# EAGLE board multi_paste (EAGLE 6.6.0)
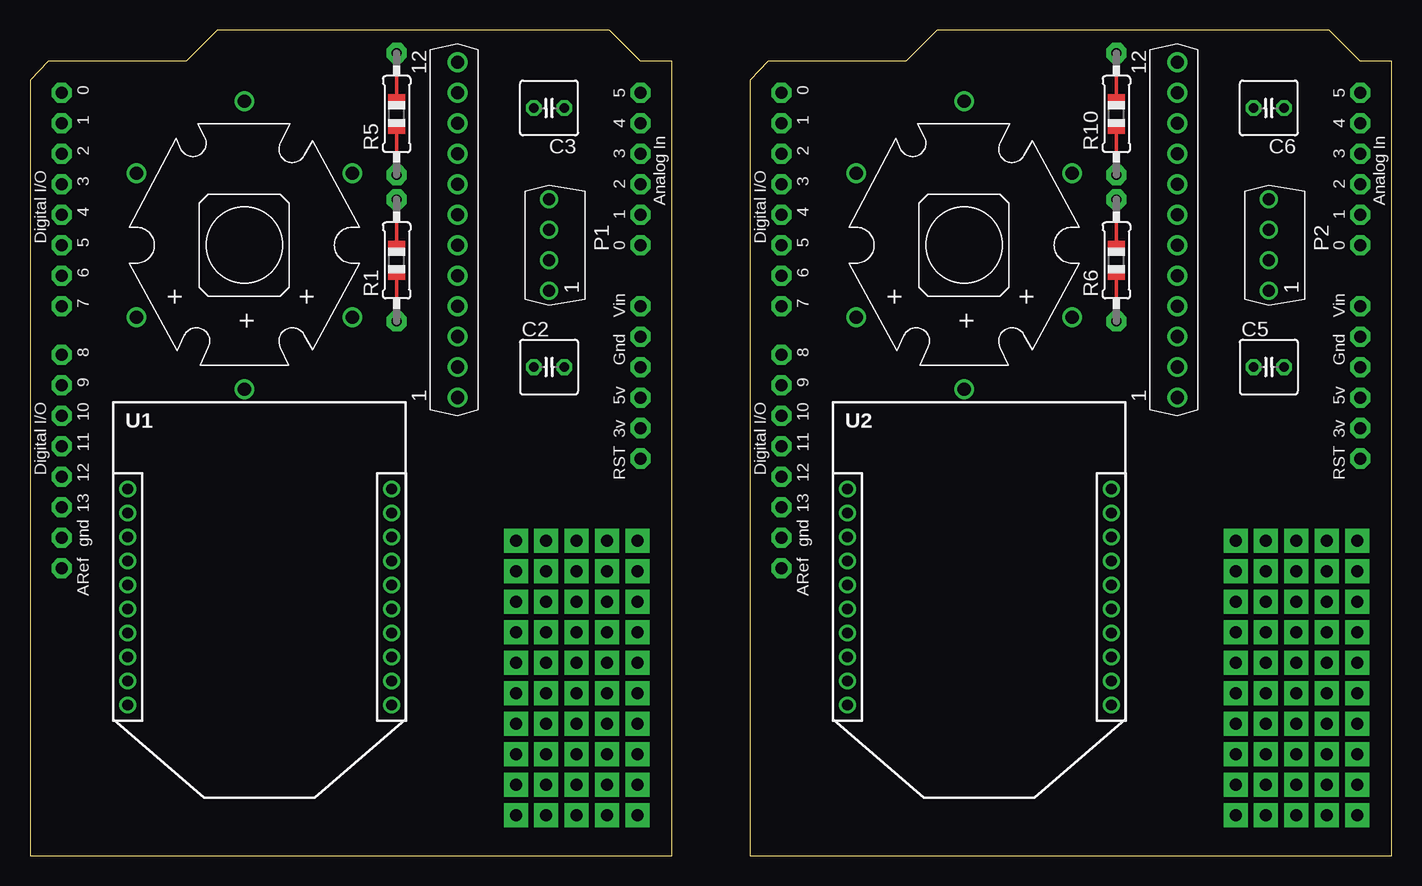
[diagram p0: board, top side]
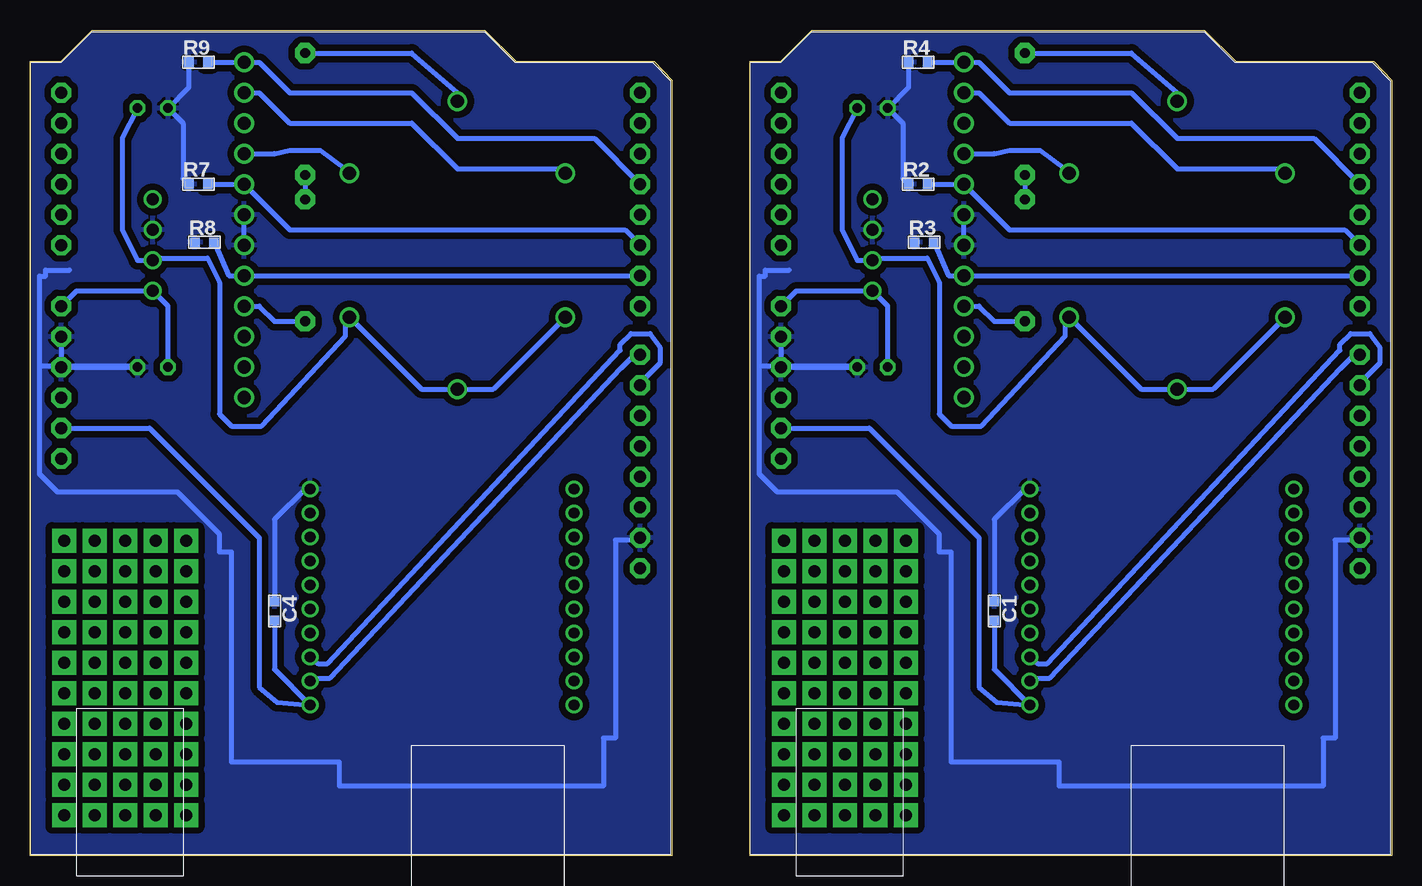
[diagram p1: board, bottom side, seen from below]

Size 113.5 x 68.8 mm. Coordinates in mm from the lower left corner, seen from the top.
Outline: 53.5,0 53.5,66.2 50.9,66.2 48.3,68.8 15.6,68.8 13,66.2 1.5,66.2 0,64.6 0,0 53.5,0
Outline: 113.5,0 113.5,66.2 110.9,66.2 108.3,68.8 75.6,68.8 73,66.2 61.5,66.2 60,64.6 60,0 113.5,0
Copper layers (1*16): Top 0.035mm / dielectric 1.5mm / Bottom 0.035mm
Design rules "default *": minimum track width 10mil, minimum drill 24mil, track to track 8mil, track to pad 8mil, pad to pad 8mil, via to via 8mil, smd to smd 8mil, copper to edge 0mil, drill to drill 8mil, minimum pad ring 10mil, minimum via ring 8mil, stop-mask expansion 4mil, vias tented up to drill 0mil, thermal gap 10mil

## Footprints (pad centres in the part's own frame; a part is rotated, then mirrored left to right if it is on the bottom)
1608(1.6*0.8MM) = smd 0.8 x 0.8: P$1 0.8,0; P$2 -0.8,0
C025-050X050 = drill 0.813 octagon: 1 -1.27,0; 2 1.27,0
OSTCXBC1C1S_WITH_HEATSINK = drill 1.1: B+ -6,9; B- 6,9; G+ -6,-9; G- 6,-9; R+ -12,0; R- 12,0
PQ3RD23 = drill 1: 1 -3.81,0; 2 -1.27,0; 3 1.27,0; 4 3.81,0
MP4401 = drill 1.1: 1 -13.97,0; 2 -11.43,0; 3 -8.89,0; 4 -6.35,0; 5 -3.81,0; 6 -1.27,0; 7 1.27,0; 8 3.81,0; 9 6.35,0; 10 8.89,0; 11 11.43,0; 12 13.97,0
0805-THM = drill 0.813 pad 1.676 octagon: 1 -5.08,0; 2 5.08,0
1608(1.6*0.8MM)' = smd 0.8 x 0.8: P$3 -0.8,0; P$4 0.8,0
XBEE_ON_XPPN101BFCN-RC = drill 0.9: 1 -11,18; 2 -11,16; 3 -11,14; 4 -11,12; 5 -11,10; 6 -11,8; 7 -11,6; 8 -11,4; 9 -11,2; 10 -11,0; 11 11,0; 12 11,2; 13 11,4; 14 11,6; 15 11,8; 16 11,10; 17 11,12; 18 11,14; 19 11,16; 20 11,18
ARDUINO-NOHOLE = drill 1 pad 1.676 octagon: 3V 35.56,2.54; 5V 38.1,2.54; A0 50.8,2.54; A1 53.34,2.54; A2 55.88,2.54; A3 58.42,2.54; A4 60.96,2.54; A5 63.5,2.54; AREF 23.876,50.8; D0 63.5,50.8; D1 60.96,50.8; D2 58.42,50.8; D3 55.88,50.8; D4 53.34,50.8; D5 50.8,50.8; D6 48.26,50.8; D7 45.72,50.8; D8 41.656,50.8; D9 39.116,50.8; D10 36.576,50.8; D11 34.036,50.8; D12 31.496,50.8; D13 28.956,50.8; GND 26.416,50.8; GND1 43.18,2.54; GND2 40.64,2.54; RESET 33.02,2.54; VIN 45.72,2.54

## Placement (x,y rotation side)
C1  [1608(1.6*0.8MM)]  33.11,20.39 270 bottom
C2  50u  [C025-050X050]  43.27,40.71 0 top
C3  50u  [C025-050X050]  43.27,62.3 180 top
C4  [1608(1.6*0.8MM)]  93.11,20.39 270 bottom
C5  50u  [C025-050X050]  103.27,40.71 0 top
C6  50u  [C025-050X050]  103.27,62.3 180 top
LED1  OSTCXBC1C1S  [OSTCXBC1C1S_WITH_HEATSINK]  17.87,50.87 90 top
LED2  OSTCXBC1C1S  [OSTCXBC1C1S_WITH_HEATSINK]  77.87,50.87 90 top
P1  PQ3RD23  [PQ3RD23]  43.27,50.87 90 top
P2  PQ3RD23  [PQ3RD23]  103.27,50.87 90 top
Q1  MP4401  [MP4401]  35.65,52.14 90 top
Q2  MP4401  [MP4401]  95.65,52.14 90 top
R1  1  [0805-THM]  30.57,49.6 90 top
R2  10k  [1608(1.6*0.8MM)']  39.46,55.95 0 bottom
R3  10k  [1608(1.6*0.8MM)']  38.96,51.1 0 bottom
R4  10k  [1608(1.6*0.8MM)']  39.46,66.11 0 bottom
R5  1  [0805-THM]  30.57,61.8 90 top
R6  1  [0805-THM]  90.57,49.6 90 top
R7  10k  [1608(1.6*0.8MM)']  99.46,55.95 0 bottom
R8  10k  [1608(1.6*0.8MM)']  98.96,51.1 0 bottom
R9  10k  [1608(1.6*0.8MM)']  99.46,66.11 0 bottom
R10  1  [0805-THM]  90.57,61.8 90 top
U1  XBEE_PROXPPN101BFCN  [XBEE_ON_XPPN101BFCN-RC]  19.14,30.55 180 top
U2  XBEE_PROXPPN101BFCN  [XBEE_ON_XPPN101BFCN-RC]  79.14,30.55 180 top
U$1  ARDUINO-NOHOLE  [ARDUINO-NOHOLE]  53.43,0.07 90 top
U$2  ARDUINO-NOHOLE  [ARDUINO-NOHOLE]  113.43,0.07 90 top

## Library data of the parts
C1 C4 = Capasitor
C2 C3 C5 C6 = rcl
LED1 LED2 = LED
P1 P2 = Voltage Regulator
Q1 Q2 = FET n-ch
R1 R5 R6 R10 U$1 U$2 = adafruit
R2-R4 R7-R9 = Resistor
U1 U2 = ZigBee Modules

## Nets
5V: U$1.5V
5V1: U$2.5V
GND: C1.P$2 C2.2 C3.2 P1.3 Q1.6 Q1.7 R2.P$3 R3.P$3 R4.P$3 U1.10 U$1.GND U$1.GND1 U$1.GND2
GND1: C4.P$2 C5.2 C6.2 P2.3 Q2.6 Q2.7 R7.P$3 R8.P$3 R9.P$3 U2.10 U$2.GND U$2.GND1 U$2.GND2
N$1: C2.1 P1.1 U$1.VIN
N$2: Q1.4 R1.1
N$3: Q1.5 R3.P$4 U$1.D6
N$4: Q1.8 R2.P$4 U$1.D5
N$5: Q1.12 R4.P$4 U$1.D3
N$6: C1.P$1 U1.1 U$1.3V
N$7: U1.2 U$1.D8
N$8: U1.3 U$1.D9
N$9: LED1.B- Q1.11
N$10: LED1.R- R5.2
N$11: R1.2 R5.1
N$13: C3.1 LED1.B+ LED1.G+ LED1.R+ P1.2
N$14: LED1.G- Q1.9
N$64: C5.1 P2.1 U$2.VIN
N$65: Q2.4 R6.1
N$66: Q2.5 R8.P$4 U$2.D6
N$67: Q2.8 R7.P$4 U$2.D5
N$68: Q2.12 R9.P$4 U$2.D3
N$69: C4.P$1 U2.1 U$2.3V
N$70: U2.2 U$2.D8
N$71: U2.3 U$2.D9
N$72: LED2.B- Q2.11
N$73: LED2.R- R10.2
N$74: C6.1 LED2.B+ LED2.G+ LED2.R+ P2.2
N$75: LED2.G- Q2.9
N$76: R6.2 R10.1

## Tracks (layer width: path | path; a pad name or v marks a point on that pad's centre or on a via)
GND
  Bottom 0.406: U$1.GND1 U$1.GND2 C2.2 44.54,40.8 52.7,40.8 | R2.P$3 40.73,56.42 40.73,61.03 C3.2 40.26,64.04 R4.P$3 | Q1.6 Q1.7 | U1.10 30.57,30.55 33.11,28.01 C1.P$2 | 52.7,40.8 52.7,48.3 52.2,48.3 52.2,48.8 50.2,48.8 | U$1.GND 2.63,26.3 4.7,26.3 4.7,9.8 5.7,9.8 5.7,5.8 27.7,5.8 27.7,7.8 36.7,7.8 36.7,25.3 37.7,25.3 37.7,26.8 41.2,30.3 51.2,30.3 52.7,31.8 52.7,40.8
  pour Bottom (isolate 0.55): 53.2,0.3 0.3,0.3 0.3,64.5 1.7,65.9 13.1,65.9 15.7,68.5 48.2,68.5 50.8,65.9 53.2,65.9
GND1
  Bottom 0.406: U$2.GND1 U$2.GND2 C5.2 104.54,40.8 112.7,40.8 | R7.P$3 100.73,56.42 100.73,61.03 C6.2 100.26,64.04 R9.P$3 | Q2.6 Q2.7 | U2.10 90.57,30.55 93.11,28.01 C4.P$2 | 112.7,40.8 112.7,48.3 112.2,48.3 112.2,48.8 110.2,48.8 | U$2.GND 62.63,26.3 64.7,26.3 64.7,9.8 65.7,9.8 65.7,5.8 87.7,5.8 87.7,7.8 96.7,7.8 96.7,25.3 97.7,25.3 97.7,26.8 101.2,30.3 111.2,30.3 112.7,31.8 112.7,40.8
  pour Bottom (isolate 0.55): 113.2,0.3 60.3,0.3 60.3,64.5 61.7,65.9 73.1,65.9 75.7,68.5 108.2,68.5 110.8,65.9 113.2,65.9
N$1
  Bottom 0.406: C2.1 42,45.79 P1.1 49.62,47.06 U$1.VIN
N$2
  Bottom 0.406: Q1.4 34.38,45.79 33.11,44.52 R1.1
N$3
  Bottom 0.406: R3.P$4 36.92,48.33 Q1.5 U$1.D6
N$4
  Bottom 0.406: R2.P$4 Q1.8 31.84,52.14 3.9,52.14 U$1.D5
N$5
  Bottom 0.406: R4.P$4 Q1.12 34.38,66.11 31.84,63.57 21.68,63.57 17.87,59.76 6.44,59.76 U$1.D3
N$6
  Bottom 0.406: U$1.3V 43.54,35.63 34.38,26.47 34.38,14.04 32.9,12.77 U1.1 33.11,15.52 C1.P$1
N$7
  Bottom 0.406: U1.2 29.7,14.8 28.5,14.8 4.21,40.63 3.19,41.67 U$1.D8
N$8
  Bottom 0.406: U1.3 29.5,16 28.7,16 4.3,42.1 4.3,42.6 3.4,43.5 1.8,43.5 0.99,42.38 0.99,41.01 2.36,39.64 2.38,39.64 U$1.D9
N$9
  Bottom 0.406: Q1.11 34.38,63.57 31.84,61.03 21.68,61.03 17.87,57.22 9.22,57.22 LED1.B-
N$10
  Bottom 0.406: R5.2 21.68,66.88 17.87,63.57 LED1.R-
N$11
  Bottom 0.406: R5.1 R1.2
N$12  (via drill 1 pad 2)
  other vias: 40.5,16.08
N$13
  Bottom 0.406: C3.1 45.81,59.76 45.81,52.14 44.54,49.6 P1.2 42.7,49.8 38.7,49.8 37.7,47.8 37.7,36.8 36.7,35.8 34.2,35.8 27.2,43.3 27.2,44.8 LED1.G+ 20.87,38.87 LED1.R+ 14.87,38.87 LED1.B+
N$14
  Bottom 0.406: Q1.9 33.11,58.49 31.84,58.76 29.3,58.76 27.22,57.22 LED1.G-
N$15  (via drill 1 pad 2)
  other vias: 40.5,18.62
N$16  (via drill 1 pad 2)
  other vias: 40.5,21.16
N$17  (via drill 1 pad 2)
  other vias: 40.5,23.7
N$18  (via drill 1 pad 2)
  other vias: 40.5,26.24
N$19  (via drill 1 pad 2)
  other vias: 43.04,16.08
N$20  (via drill 1 pad 2)
  other vias: 43.04,18.62
N$21  (via drill 1 pad 2)
  other vias: 43.04,21.16
N$22  (via drill 1 pad 2)
  other vias: 43.04,23.7
N$23  (via drill 1 pad 2)
  other vias: 43.04,26.24
N$24  (via drill 1 pad 2)
  other vias: 45.58,26.24
N$25  (via drill 1 pad 2)
  other vias: 45.58,23.7
N$26  (via drill 1 pad 2)
  other vias: 45.58,21.16
N$27  (via drill 1 pad 2)
  other vias: 45.58,18.62
N$28  (via drill 1 pad 2)
  other vias: 45.58,16.08
N$29  (via drill 1 pad 2)
  other vias: 48.12,16.08
N$30  (via drill 1 pad 2)
  other vias: 48.12,18.62
N$31  (via drill 1 pad 2)
  other vias: 48.12,21.16
N$32  (via drill 1 pad 2)
  other vias: 48.12,23.7
N$33  (via drill 1 pad 2)
  other vias: 48.12,26.24
N$34  (via drill 1 pad 2)
  other vias: 50.66,26.24
N$35  (via drill 1 pad 2)
  other vias: 50.66,23.7
N$36  (via drill 1 pad 2)
  other vias: 50.66,21.16
N$37  (via drill 1 pad 2)
  other vias: 50.66,18.62
N$38  (via drill 1 pad 2)
  other vias: 50.66,16.08
N$39  (via drill 1 pad 2)
  other vias: 50.66,13.54
N$40  (via drill 1 pad 2)
  other vias: 48.12,13.54
N$41  (via drill 1 pad 2)
  other vias: 45.58,13.54
N$42  (via drill 1 pad 2)
  other vias: 43.04,13.54
N$43  (via drill 1 pad 2)
  other vias: 40.5,13.54
N$44  (via drill 1 pad 2)
  other vias: 40.5,3.38
N$45  (via drill 1 pad 2)
  other vias: 43.04,11
N$46  (via drill 1 pad 2)
  other vias: 45.58,11
N$47  (via drill 1 pad 2)
  other vias: 48.12,11
N$48  (via drill 1 pad 2)
  other vias: 50.66,11
N$49  (via drill 1 pad 2)
  other vias: 50.66,3.38
N$50  (via drill 1 pad 2)
  other vias: 50.66,5.92
N$51  (via drill 1 pad 2)
  other vias: 50.66,8.46
N$52  (via drill 1 pad 2)
  other vias: 48.12,5.92
N$53  (via drill 1 pad 2)
  other vias: 48.12,3.38
N$54  (via drill 1 pad 2)
  other vias: 45.58,3.38
N$55  (via drill 1 pad 2)
  other vias: 45.58,5.92
N$56  (via drill 1 pad 2)
  other vias: 48.12,8.46
N$57  (via drill 1 pad 2)
  other vias: 45.58,8.46
N$58  (via drill 1 pad 2)
  other vias: 43.04,5.92
N$59  (via drill 1 pad 2)
  other vias: 43.04,8.46
N$60  (via drill 1 pad 2)
  other vias: 40.5,11
N$61  (via drill 1 pad 2)
  other vias: 40.5,8.46
N$62  (via drill 1 pad 2)
  other vias: 40.5,5.92
N$63  (via drill 1 pad 2)
  other vias: 43.04,3.38
N$64
  Bottom 0.406: C5.1 102,45.79 P2.1 109.62,47.06 U$2.VIN
N$65
  Bottom 0.406: Q2.4 94.38,45.79 93.11,44.52 R6.1
N$66
  Bottom 0.406: R8.P$4 96.92,48.33 Q2.5 U$2.D6
N$67
  Bottom 0.406: R7.P$4 Q2.8 91.84,52.14 63.9,52.14 U$2.D5
N$68
  Bottom 0.406: R9.P$4 Q2.12 94.38,66.11 91.84,63.57 81.68,63.57 77.87,59.76 66.44,59.76 U$2.D3
N$69
  Bottom 0.406: U$2.3V 103.54,35.63 94.38,26.47 94.38,14.04 92.9,12.77 U2.1 93.11,15.52 C4.P$1
N$70
  Bottom 0.406: U2.2 89.7,14.8 88.5,14.8 64.21,40.63 63.19,41.67 U$2.D8
N$71
  Bottom 0.406: U2.3 89.5,16 88.7,16 64.3,42.1 64.3,42.6 63.4,43.5 61.8,43.5 60.99,42.38 60.99,41.01 62.36,39.64 62.38,39.64 U$2.D9
N$72
  Bottom 0.406: Q2.11 94.38,63.57 91.84,61.03 81.68,61.03 77.87,57.22 69.22,57.22 LED2.B-
N$73
  Bottom 0.406: R10.2 81.68,66.88 77.87,63.57 LED2.R-
N$74
  Bottom 0.406: C6.1 105.81,59.76 105.81,52.14 104.54,49.6 P2.2 102.7,49.8 98.7,49.8 97.7,47.8 97.7,36.8 96.7,35.8 94.2,35.8 87.2,43.3 87.2,44.8 LED2.G+ 80.87,38.87 LED2.R+ 74.87,38.87 LED2.B+
N$75
  Bottom 0.406: Q2.9 93.11,58.49 91.84,58.76 89.3,58.76 87.22,57.22 LED2.G-
N$76
  Bottom 0.406: R10.1 R6.2
N$77  (via drill 1 pad 2)
  other vias: 100.5,16.08
N$78  (via drill 1 pad 2)
  other vias: 100.5,18.62
N$79  (via drill 1 pad 2)
  other vias: 100.5,21.16
N$80  (via drill 1 pad 2)
  other vias: 100.5,23.7
N$81  (via drill 1 pad 2)
  other vias: 100.5,26.24
N$82  (via drill 1 pad 2)
  other vias: 103.04,16.08
N$83  (via drill 1 pad 2)
  other vias: 103.04,18.62
N$84  (via drill 1 pad 2)
  other vias: 103.04,21.16
N$85  (via drill 1 pad 2)
  other vias: 103.04,23.7
N$86  (via drill 1 pad 2)
  other vias: 103.04,26.24
N$87  (via drill 1 pad 2)
  other vias: 105.58,26.24
N$88  (via drill 1 pad 2)
  other vias: 105.58,23.7
N$89  (via drill 1 pad 2)
  other vias: 105.58,21.16
N$90  (via drill 1 pad 2)
  other vias: 105.58,18.62
N$91  (via drill 1 pad 2)
  other vias: 105.58,16.08
N$92  (via drill 1 pad 2)
  other vias: 108.12,16.08
N$93  (via drill 1 pad 2)
  other vias: 108.12,18.62
N$94  (via drill 1 pad 2)
  other vias: 108.12,21.16
N$95  (via drill 1 pad 2)
  other vias: 108.12,23.7
N$96  (via drill 1 pad 2)
  other vias: 108.12,26.24
N$97  (via drill 1 pad 2)
  other vias: 110.66,26.24
N$98  (via drill 1 pad 2)
  other vias: 110.66,23.7
N$99  (via drill 1 pad 2)
  other vias: 110.66,21.16
N$100  (via drill 1 pad 2)
  other vias: 110.66,18.62
N$101  (via drill 1 pad 2)
  other vias: 110.66,16.08
N$102  (via drill 1 pad 2)
  other vias: 110.66,13.54
N$103  (via drill 1 pad 2)
  other vias: 108.12,13.54
N$104  (via drill 1 pad 2)
  other vias: 105.58,13.54
N$105  (via drill 1 pad 2)
  other vias: 103.04,13.54
N$106  (via drill 1 pad 2)
  other vias: 100.5,13.54
N$107  (via drill 1 pad 2)
  other vias: 110.66,3.38
N$108  (via drill 1 pad 2)
  other vias: 110.66,5.92
N$109  (via drill 1 pad 2)
  other vias: 110.66,8.46
N$110  (via drill 1 pad 2)
  other vias: 108.12,3.38
N$111  (via drill 1 pad 2)
  other vias: 108.12,5.92
N$112  (via drill 1 pad 2)
  other vias: 105.58,3.38
N$113  (via drill 1 pad 2)
  other vias: 105.58,5.92
N$114  (via drill 1 pad 2)
  other vias: 108.12,8.46
N$115  (via drill 1 pad 2)
  other vias: 105.58,8.46
N$116  (via drill 1 pad 2)
  other vias: 103.04,5.92
N$117  (via drill 1 pad 2)
  other vias: 103.04,8.46
N$118  (via drill 1 pad 2)
  other vias: 100.5,8.46
N$119  (via drill 1 pad 2)
  other vias: 100.5,11
N$120  (via drill 1 pad 2)
  other vias: 100.5,5.92
N$121  (via drill 1 pad 2)
  other vias: 103.04,3.38
N$122  (via drill 1 pad 2)
  other vias: 100.5,3.38
N$123  (via drill 1 pad 2)
  other vias: 103.04,11
N$124  (via drill 1 pad 2)
  other vias: 105.58,11
N$125  (via drill 1 pad 2)
  other vias: 108.12,11
N$126  (via drill 1 pad 2)
  other vias: 110.66,11